# EAGLE board newbottomboard (EAGLE 9.4.1)
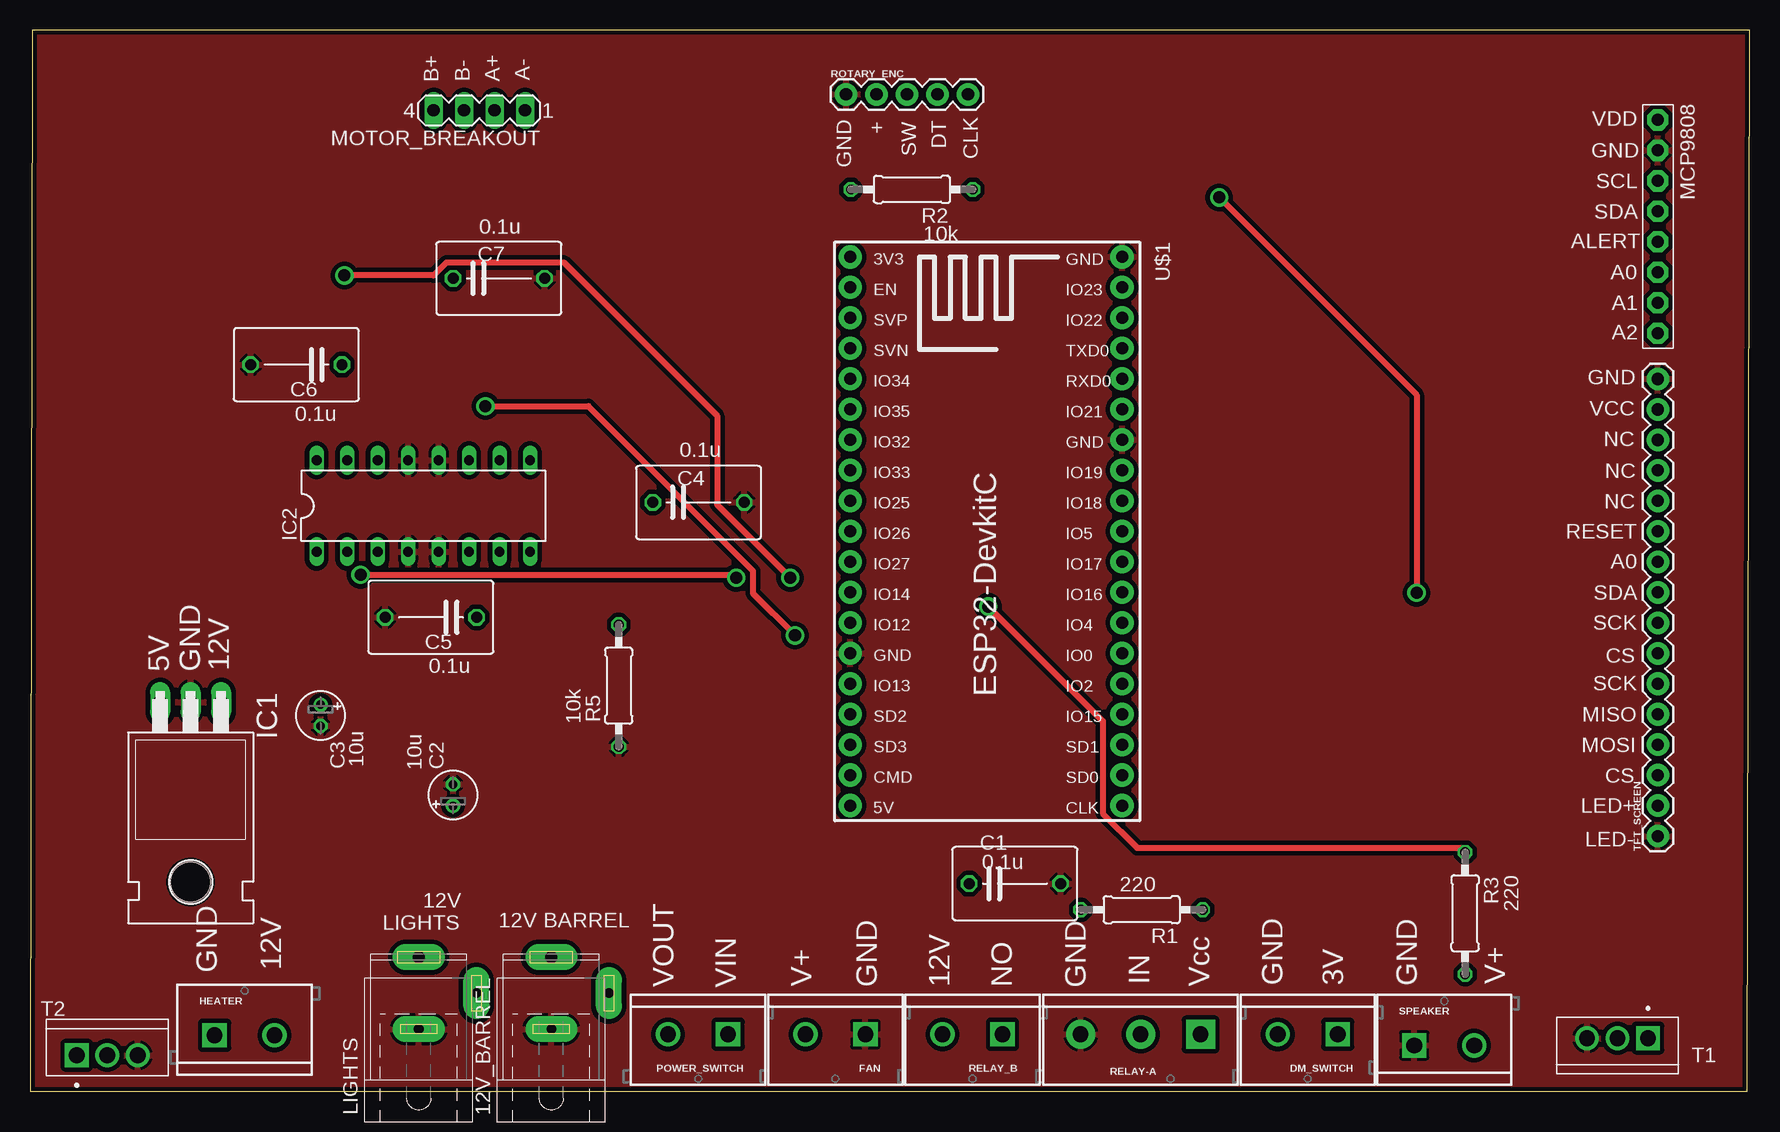
[diagram p0: board, top side]
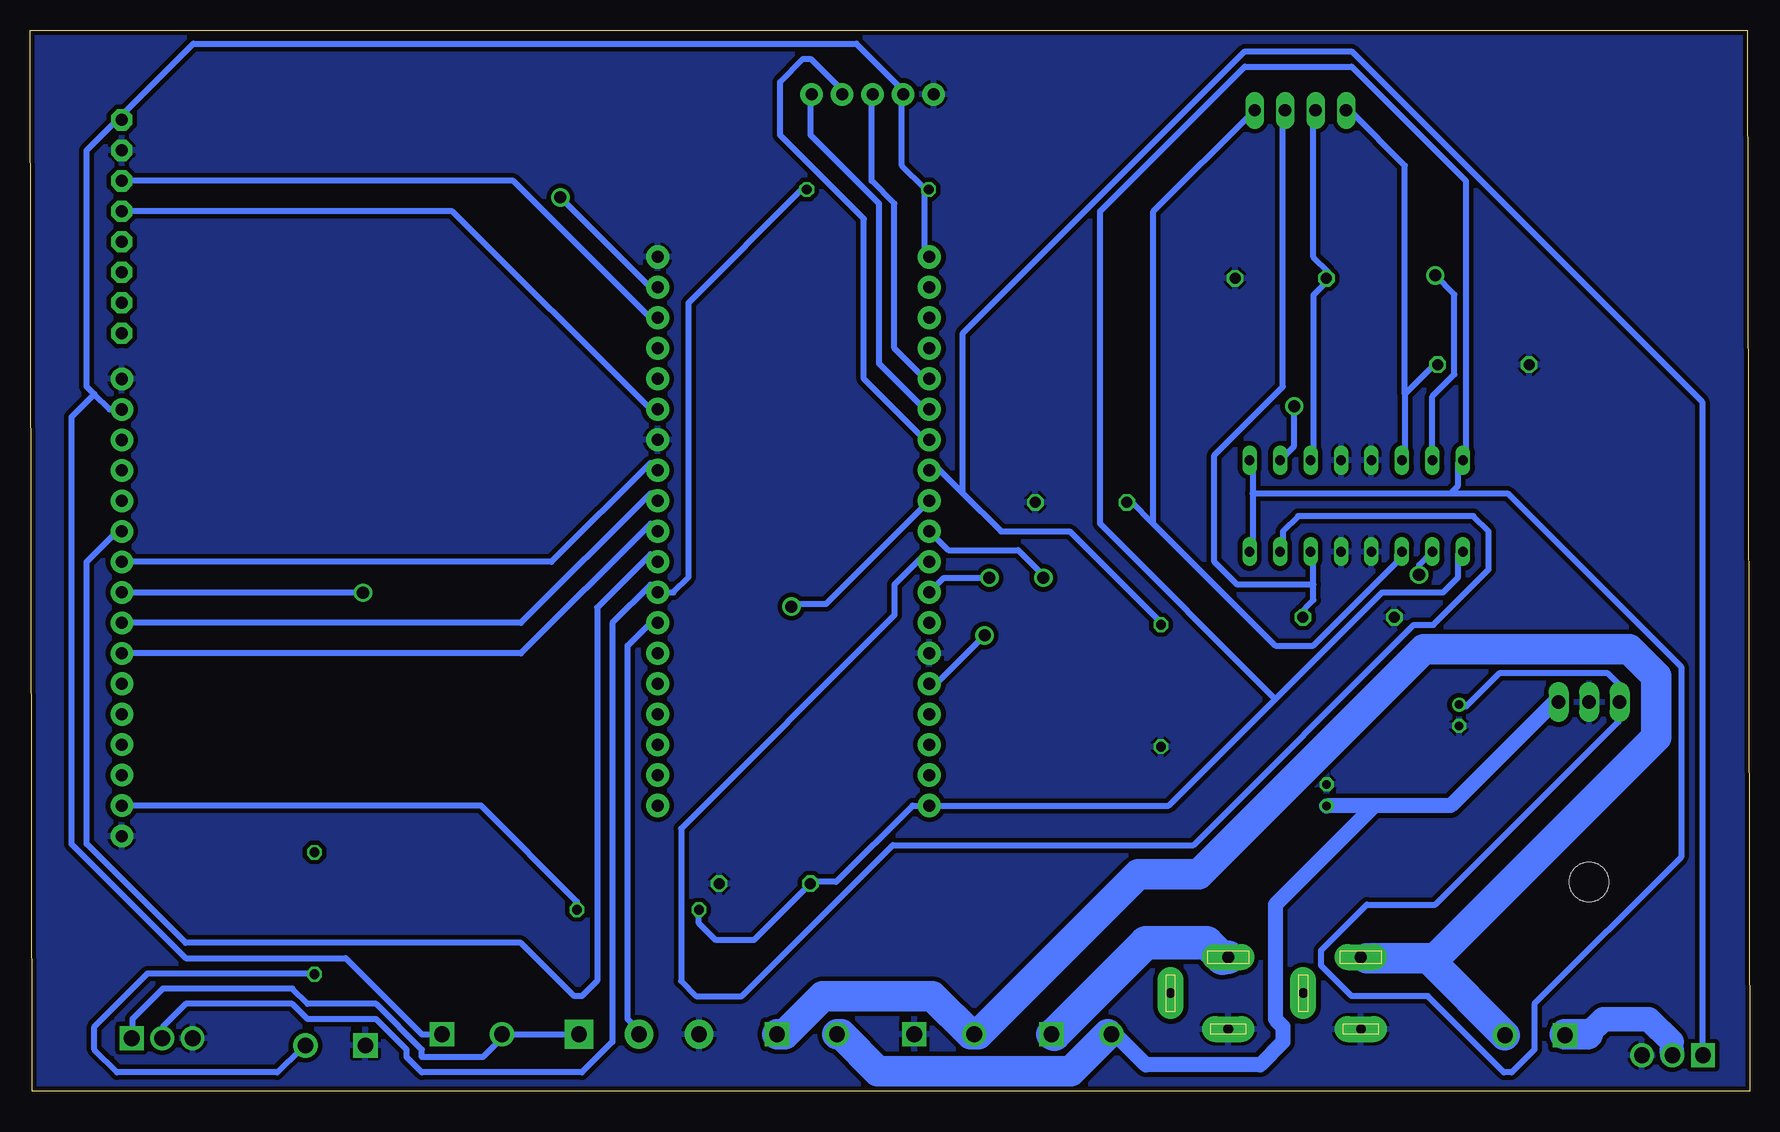
[diagram p1: board, bottom side, seen from below]

Size 143.3 x 88.45 mm. Coordinates in mm from the lower left corner, seen from the top.
Outline: 0,0 143.1,0 143.3,88.45 0.2,88.45 0,0
Copper layers (1*16): Top 0.0178mm / dielectric 59mil / Bottom 0.0178mm
Design rules "epl-lpkf": minimum track width 8mil, minimum drill 0.35mm, track to track 8mil, track to pad 8mil, pad to pad 8mil, via to via 8mil, smd to smd 8mil, copper to edge 15mil, drill to drill 15mil, minimum pad ring 8mil, minimum via ring 8mil, stop-mask expansion 3mil, vias tented up to drill 0mil, thermal gap 10mil
Net classes: 0 default: width 0.508 mm, drill 1.5 mm, clearance 0.381 mm; 1 thick: width 1.27 mm, drill 1.199 mm, clearance 0.381 mm; 2 high current: width 4.318 mm, drill 1.199 mm, clearance 0.381 mm

## Footprints (pad centres in the part's own frame; a part is rotated, then mirrored left to right if it is on the bottom)
SPC4077 = drill 0.8 pad 2.184 long: 1 -3,0; 2 0,-4.8 | drill 1 pad 2.184 long: 3 3,0
C075-063X106 = drill 0.914 octagon: 1 -3.81,0; 2 3.81,0
E1,8-4 = drill 0.711 pad 1.168: + -0.889,0 | drill 0.711 pad 1.168 octagon: - 0.889,0
SCREWTERMINAL-5MM-2 = drill 1.3 pad 2.032 square: 1 0,0 | drill 1.3 pad 2.032: 2 5,0
TO220H = drill 1.118 long: 1 -2.54,-10.16; 2 0,-10.16; 3 2.54,-10.16 | hole 3.302: 0,4.826
DIL16 = drill 0.813 long: 1 -8.89,-3.81; 2 -6.35,-3.81; 3 -3.81,-3.81; 4 -1.27,-3.81; 5 1.27,-3.81; 6 3.81,-3.81; 7 6.35,-3.81; 8 8.89,-3.81; 9 8.89,3.81; 10 6.35,3.81; 11 3.81,3.81; 12 1.27,3.81; 13 -1.27,3.81; 14 -3.81,3.81; 15 -6.35,3.81; 16 -8.89,3.81
1X08-BIG = drill 1.016 pad 1.778 octagon: 1 -8.89,0; 2 -6.35,0; 3 -3.81,0; 4 -1.27,0; 5 1.27,0; 6 3.81,0; 7 6.35,0; 8 8.89,0
MA04-1 = drill 1.016 long: 1 -3.81,0; 2 -1.27,0; 3 1.27,0; 4 3.81,0
0207/10 = drill 0.813 octagon: 1 -5.08,0; 2 5.08,0
SCREWTERMINAL-5MM-3 = drill 1.3 pad 2.413 square: 1 0,0 | drill 1.3 pad 2.413: 2 5,0; 3 10,0
1X05 = drill 1.016 pad 1.88: 1 0,0; 2 2.54,0; 3 5.08,0; 4 7.62,0; 5 10.16,0
TRANS_RFP30N06LE = drill 1.32 square: 1 -2.54,0 | drill 1.32: 2 0,0; 3 2.54,0
1X16 = drill 1.016 pad 1.88: 1 0,0; 2 2.54,0; 3 5.08,0; 4 7.62,0; 5 10.16,0; 6 12.7,0; 7 15.24,0; 8 17.78,0; 9 20.32,0; 10 22.86,0; 11 25.4,0; 12 27.94,0; 13 30.48,0; 14 33.02,0; 15 35.56,0; 16 38.1,0
ESP32-DEVKITC = drill 1 pad 1.93: 1 -22.87,-11.42; 2 -20.33,-11.42; 3 -17.79,-11.42; 4 -15.25,-11.42; 5 -12.71,-11.42; 6 -10.17,-11.42; 7 -7.63,-11.42; 8 -5.09,-11.42; 9 -2.55,-11.42; 10 -0.01,-11.42; 11 2.53,-11.42; 12 5.07,-11.42; 13 7.61,-11.42; 14 10.15,-11.42; 15 12.69,-11.42; 16 15.23,-11.42; 17 17.77,-11.42; 18 20.31,-11.42; 19 22.85,-11.42; 20 22.85,11.23; 21 20.31,11.23; 22 17.77,11.23; 23 15.23,11.23; 24 12.69,11.23; 25 10.15,11.23; 26 7.61,11.23; 27 5.07,11.23; 28 2.53,11.23; 29 -0.01,11.23; 30 -2.55,11.23; 31 -5.09,11.23; 32 -7.63,11.23; 33 -10.17,11.23; 34 -12.71,11.23; 35 -15.25,11.23; 36 -17.79,11.23; 37 -20.33,11.23; 38 -22.87,11.23

## Placement (x,y rotation side)
12V_BARREL  [SPC4077]  43.45,8.19 90 top
C1  .1uF  [C075-063X106]  82.07,17.32 0 top
C2  10uF  [E1,8-4]  35.25,24.69 90 top
C3  10uF  [E1,8-4]  24.21,31.34 270 top
C4  0.1u  [C075-063X106]  55.71,49.08 0 top
C5  0.1u  [C075-063X106]  33.41,39.51 180 top
C6  0.1u  [C075-063X106]  22.19,60.56 180 top
C7  0.1u  [C075-063X106]  39.07,67.76 0 top
DM_SWITCH  [SCREWTERMINAL-5MM-2]  108.98,4.76 180 top
FAN  [SCREWTERMINAL-5MM-2]  69.61,4.76 180 top
HEATER  [SCREWTERMINAL-5MM-2]  15.39,4.68 0 top
IC1  7805T  [TO220H]  13.38,22.28 180 top
IC2  L293D  [DIL16]  32.78,48.79 0 top
LIGHTS  [SPC4077]  32.4,8.19 90 top
MCP9808  [1X08-BIG]  135.65,72.07 270 top
MOTOR_BREAKOUT  [MA04-1]  37.44,81.75 180 top
POWER_SWITCH  [SCREWTERMINAL-5MM-2]  58.18,4.76 180 top
R1  220  [0207/10]  92.64,15.14 180 top
R2  10k  [0207/10]  73.49,75.16 180 top
R3  220  [0207/10]  119.59,14.84 270 top
R5  10k  [0207/10]  49.06,33.81 90 top
RELAY-A  [SCREWTERMINAL-5MM-3]  97.55,4.76 180 top
RELAY_B  [SCREWTERMINAL-5MM-2]  81.04,4.76 180 top
ROTARY_ENC  [1X05]  68,83.09 0 top
SPEAKER  [SCREWTERMINAL-5MM-2]  115.35,3.84 0 top
T1  RFP30N06LE  [TRANS_RFP30N06LE]  132.29,4.44 180 top
T2  RFP30N06LE  [TRANS_RFP30N06LE]  6.43,3.02 0 top
TFT_SCREEN  [1X16]  135.65,21.27 90 top
U$1  ESP32DEVKITC  [ESP32-DEVKITC]  79.77,46.67 270 top

## Library data of the parts
12V_BARREL LIGHTS = con-jack; OC_FARNELL: unknown; OC_NEWARK: unknown
C1-C7 = rcl; SPICEPREFIX: C
DM_SWITCH FAN HEATER POWER_SWITCH RELAY_B SPEAKER = SparkFun-Connectors; SF_SKU: PRT-08432
IC1 = linear
IC2 = st-microelectronics; MPN: L293D; OC_FARNELL: 9589619; OC_NEWARK: 56P8249
MCP9808 = adafruit
MOTOR_BREAKOUT = con-lstb; OC_FARNELL: unknown; OC_NEWARK: unknown
R1-R3 R5 = rcl; SPICEPREFIX: R
RELAY-A = SparkFun-Connectors; PROD_ID: CONN-10134; SF_SKU: PRT-08433
ROTARY_ENC TFT_SCREEN = SparkFun-Connectors
T1 T2 = RFP30N06LE; AVAILABILITY: Unavailable; MF: ON Semiconductor; MP: RFP30N06LE; PACKAGE: TO-220 Intersil; PRICE: None
U$1 = ESP32-DEVKITC

## Nets
+3V3: DM_SWITCH.1 MCP9808.1 R2.2 ROTARY_ENC.2 TFT_SCREEN.15 U$1.1
+5V: C1.1 C3.+ IC1.3 IC2.1 IC2.8 IC2.9 IC2.16 R1.2 U$1.19
GND: 12V_BARREL.1 C1.2 C2.- C3.- C4.2 C5.2 C6.2 C7.2 FAN.1 IC1.2 IC2.4 IC2.5 IC2.12 IC2.13 LIGHTS.1 MCP9808.2 R5.1 RELAY-A.3 ROTARY_ENC.1 SPEAKER.1 T1.3 T2.3 TFT_SCREEN.1 TFT_SCREEN.16 U$1.14 U$1.32 U$1.38
N$1: TFT_SCREEN.9 U$1.37
N$2: IC2.15 U$1.12
N$3 [thick]: 12V_BARREL.3 POWER_SWITCH.1
N$4: HEATER.1 T2.2
N$5: IC2.7 U$1.11
N$6: R3.2 SPEAKER.2
N$7: C5.1 IC2.6 MOTOR_BREAKOUT.2
N$8: DM_SWITCH.2 RELAY-A.1 T1.1
N$9: R2.1 T1.2 U$1.27
N$10: MCP9808.3 U$1.36
N$11: MCP9808.4 U$1.33
N$13: IC2.2 U$1.10
N$14: R5.2 T2.1 U$1.8
N$15: C4.1 IC2.3 MOTOR_BREAKOUT.1
N$16: RELAY-A.2 U$1.26
N$17: R1.1 TFT_SCREEN.2
N$18: ROTARY_ENC.3 U$1.5
N$19: ROTARY_ENC.4 U$1.7
N$20: ROTARY_ENC.5 U$1.6
N$21: TFT_SCREEN.11 U$1.28
N$22: TFT_SCREEN.10 U$1.31
N$23: C7.1 IC2.11 MOTOR_BREAKOUT.3
N$24: TFT_SCREEN.8 U$1.30
N$25: TFT_SCREEN.7 U$1.29
N$26: R3.1 U$1.9
N$27: C6.1 IC2.14 MOTOR_BREAKOUT.4
N$28 [thick]: FAN.2 HEATER.2 LIGHTS.3 RELAY_B.1
N$29: IC2.10 U$1.15
V+ [thick]: C2.+ IC1.1 POWER_SWITCH.2 RELAY_B.2

## Tracks (layer width: path | path; a pad name or v marks a point on that pad's centre or on a via)
+3V3
  Bottom 0.508: 68.73,75.25 68.73,70.17 U$1.1 | 68.73,75.25 70.64,77.15 70.64,82.87 ROTARY_ENC.2 70.64,83.5 74.45,87.31 129.69,87.31 136.04,80.96 | 68.73,75.25 R2.2 | 136.04,80.96 138.58,78.42 138.58,58.73 137.94,58.1 | 137.94,58.1 136.68,56.83 TFT_SCREEN.15 | DM_SWITCH.1 110.64,4.76 116.99,11.11 130.33,11.11 139.85,20.63 139.85,56.2 137.94,58.1 | 136.04,80.96 MCP9808.1
+5V
  Bottom 0.508: C3.+ 23.64,32.06 20.87,34.84 11.81,34.84 10.95,33.97 10.95,32.7 IC1.3 10.95,32.06 10.95,30.79 26.18,15.55 31.9,15.55 35.71,11.74 35.71,10.47 33.17,7.94 26.82,7.94 20.47,1.58 19.83,1.58 17.93,3.49 17.93,7.3 5.7,19.53 5.7,35.39 20.15,49.85 24.91,49.85 | 41.42,49.85 41.42,52.39 IC2.9 | 41.42,49.85 41.42,45.4 IC2.8 | 24.91,49.85 24.28,50.48 24.28,52.39 IC2.16 23.64,53.02 23.64,75.88 33.17,85.41 42.06,85.41 54.12,73.34 54.12,47.3 39.52,32.7 | 41.42,49.85 24.91,49.85 | 39.52,32.7 48.41,23.81 68.09,23.81 U$1.19 69.76,23.82 76.12,17.46 78.26,17.46 C1.1 82.98,12.6 86.15,12.6 87.56,14.01 R1.2 | 39.52,32.7 30.63,41.59 25.55,41.59 24.28,42.86 24.28,44.77 IC2.1
GND
  pour Top: 0.2,88.4 0.2,0.05 143.25,0.05 143.25,88.4
  pour Bottom: 0.2,88.4 0.2,0 143.25,0 143.25,88.4
N$1  (via drill 1.02)
  Top 0.508: v99.1,74.5 115.55,58.05 v115.55,41.55
  Bottom 0.508: TFT_SCREEN.9 135.61,41.55 v115.55,41.55 | v99.1,74.5 91.6,67 U$1.37
N$2  (via drill 1.02)
  Top 0.508: v63.35,42.8 57.25,48.9 57.25,56.3 44.47,69.08 34.71,69.08 33.63,68 v26.2,68
  Bottom 0.508: IC2.15 26.43,57.92 24.6,59.75 24.6,66.4 v26.2,68 | U$1.12 67.15,42.8 v63.35,42.8
N$3
  Bottom 2.54: 57.93,4.76 POWER_SWITCH.1
  Bottom 2.794: 57.93,4.76 50.31,12.38 45.23,12.38 43.96,11.11 12V_BARREL.3
N$4
  Bottom 0.508: 6.5,4.12 6.5,3.49 | 15.39,4.76 HEATER.1
  Bottom 2.032: 6.5,4.12 8.41,6.03 12.21,6.03 13.49,4.76 | 6.5,3.49 T2.2
  Bottom 2.54: 15.39,4.76 13.49,4.76
N$5
  Bottom 0.508: IC2.7 38.88,45.4 38.88,46.67 37.62,47.94 23.01,47.94 21.74,46.67 21.74,43.5 26.35,38.88 27.97,38.88 46.34,20.52 71.39,20.52 83.97,7.94 87.78,7.94 89.05,9.21 89.05,21.9 71.27,39.69 71.27,42.23 68.73,44.77 U$1.11
N$6
  Bottom 0.508: R3.2 120.17,9.84 133.5,9.84 137.94,5.4 137.94,3.49 136.04,1.58 122.71,1.58 120.8,3.49 SPEAKER.2
N$7
  Bottom 0.508: 36.34,42.23 36.34,40.96 37.62,39.69 C5.1 | 36.34,42.23 36.34,44.77 IC2.6 | 36.34,42.23 42.7,42.23 44.6,44.13 44.6,53.02 38.88,58.73 38.88,81.59 MOTOR_BREAKOUT.2
N$8
  Bottom 0.508: 103.66,4.76 105.56,2.85 110.64,2.85 110.64,3.49 114.45,7.3 120.17,7.3 121.44,8.57 132.23,8.57 134.77,6.03 134.77,4.76 T1.1 | 103.66,4.76 RELAY-A.1 | 103.66,4.76 DM_SWITCH.2
N$9
  Bottom 0.508: R2.1 78.89,75.25 88.42,65.72 88.42,42.86 89.69,41.59 90.96,41.59 U$1.27 91.59,42.23 94.77,39.05 94.77,4.12 97.31,1.58 110.64,1.58 111.91,2.85 111.91,3.49 114.45,6.03 120.17,6.03 121.44,7.3 130.33,7.3 132.23,5.4 132.23,4.76 T1.2
N$10
  Bottom 0.508: MCP9808.3 103.02,75.88 91.59,64.45 U$1.36
N$11
  Bottom 0.508: MCP9808.4 108.1,73.34 91.59,56.83 U$1.33
N$13  (via drill 1.02)
  Top 0.508: v27.55,43.05 58.6,43.05 v58.85,42.8
  Bottom 0.508: IC2.2 27.55,43.86 v27.55,43.05 | U$1.10 66.77,45.1 60.95,45.1 58.85,43 v58.85,42.8
N$14
  Bottom 0.508: 65.56,49.85 68.09,52.39 U$1.8 | 65.56,49.85 62.38,46.67 56.66,46.67 49.05,39.05 R5.2 | 65.56,49.85 65.56,63.18 42.06,86.67 33.17,86.67 3.96,57.47 3.96,3.49 T2.1
N$15
  Bottom 0.508: 49.68,47.3 51.59,49.21 C4.1 | 49.68,47.3 39.52,37.15 36.34,37.15 29.36,44.13 29.36,44.77 IC2.3 | 49.68,47.3 49.68,73.34 41.42,81.59 MOTOR_BREAKOUT.1
N$16
  Bottom 0.508: U$1.26 91.59,39.05 93.5,37.15 93.5,6.03 92.23,4.76 RELAY-A.2
N$17
  Bottom 0.508: TFT_SCREEN.2 105.71,23.81 97.72,15.82 R1.1
N$18
  Bottom 0.508: ROTARY_ENC.3 73.18,82.87 73.18,75.88 71.27,73.98 71.27,61.91 68.73,59.37 U$1.5
N$19
  Bottom 0.508: ROTARY_ENC.4 75.72,83.5 78.26,86.04 78.89,86.04 80.8,84.14 80.8,79.69 73.81,72.7 73.81,59.37 68.73,54.29 U$1.7
N$20
  Bottom 0.508: ROTARY_ENC.5 78.26,82.87 78.26,79.69 72.54,73.98 72.54,60.64 68.73,56.83 U$1.6
N$21
  Bottom 0.508: TFT_SCREEN.11 136.04,46.67 138.58,44.13 138.58,20.63 130.33,12.38 102.39,12.38 97.94,7.94 97.31,7.94 96.04,9.21 96.04,40.32 91.59,44.77 U$1.28
N$22
  Bottom 0.508: TFT_SCREEN.10 99.84,44.13 91.59,52.39 U$1.31
N$23
  Bottom 0.508: IC2.11 36.34,53.02 36.34,66.36 35.07,67.62 C7.1 35.07,68.26 36.34,69.53 36.34,81.59 MOTOR_BREAKOUT.3
N$24
  Bottom 0.508: TFT_SCREEN.8 102.39,39.05 91.59,49.85 U$1.30
N$25
  Bottom 0.508: TFT_SCREEN.7 102.39,36.51 91.59,47.3 U$1.29
N$26  (via drill 1.02)
  Top 0.508: v79.85,40.4 89.4,30.85 89.4,23.16 92.26,20.3 119.21,20.3 R3.1
  Bottom 0.508: U$1.9 76.97,40.6 79.65,40.6 v79.85,40.4
N$27
  Bottom 0.508: 28.72,58.1 28.72,53.02 IC2.14 | 28.72,58.1 26.18,60.64 C6.1 | 28.72,58.1 28.72,77.15 33.17,81.59 MOTOR_BREAKOUT.4
N$28
  Bottom 1.27: 64.92,4.76 FAN.2 | 26.82,11.11 26.5,10.79 | 31.9,11.11 LIGHTS.3
  Bottom 2.54: 64.92,4.76 68.09,7.94 77.23,7.94 80.41,4.76 RELAY_B.1 | HEATER.2 26.5,10.79 7.77,29.52 7.77,34.61 10.03,36.86 27.15,36.86 45.92,18.09 50.95,18.09 64.29,4.76 FAN.2 | 31.9,11.11 26.82,11.11
N$29  (via drill 1.02)
  Top 0.508: v63.75,38 60.25,41.5 60.25,43.38 46.53,57.1 v37.95,57.1
  Bottom 0.508: IC2.10 37.95,53.78 v37.95,57.1 | v63.75,38 67.77,33.98 U$1.15
V+
  Bottom 1.27: 53.49,4.76 POWER_SWITCH.2 52.85,4.76 50.31,2.22 40.79,2.22 38.88,4.12 38.88,5.4 39.52,6.03 39.52,15.55 31.26,23.81 | 31.26,23.81 24.91,23.81 16.02,32.7 IC1.1 | 31.26,23.81 35.07,23.81 C2.+
  Bottom 2.54: 53.49,4.76 56.57,1.68 72.64,1.68 75.72,4.76 RELAY_B.2

## Text on the board
tPlace: B+ | B- | A+ | A- | VDD | + | DT | SW | CLK | GND | GND | SCL | SDA | 0.1u | 10k | ALERT | A0 | A1 | A2 | GND | 0.1u | VCC | NC | 0.1u | NC | NC | RESET | A0 | SDA | SCK | CS | 5V | GND | 12V | 0.1u | SCK | 10k | MISO | MOSI | 10u | 10u | CS | LED+ | LED- | 0.1u | 220 | 12V | 220 | 12V BARREL | LIGHTS | GND | 12V | VIN | V+ | GND | 12V | NO | GND | IN | Vcc | GND | 3V | GND | V+
tNames: VOUT